# Altium PCB MainDesign_Small.PcbDoc
Units mm, origin at the board's own origin, x right, y up, seen from the top; angles counter-clockwise.
Board outline 20.1 x 20.19 mm, 2 copper layers (Top Layer, Bottom Layer); 43 components, 30 nets, 181 pads, 36 vias.
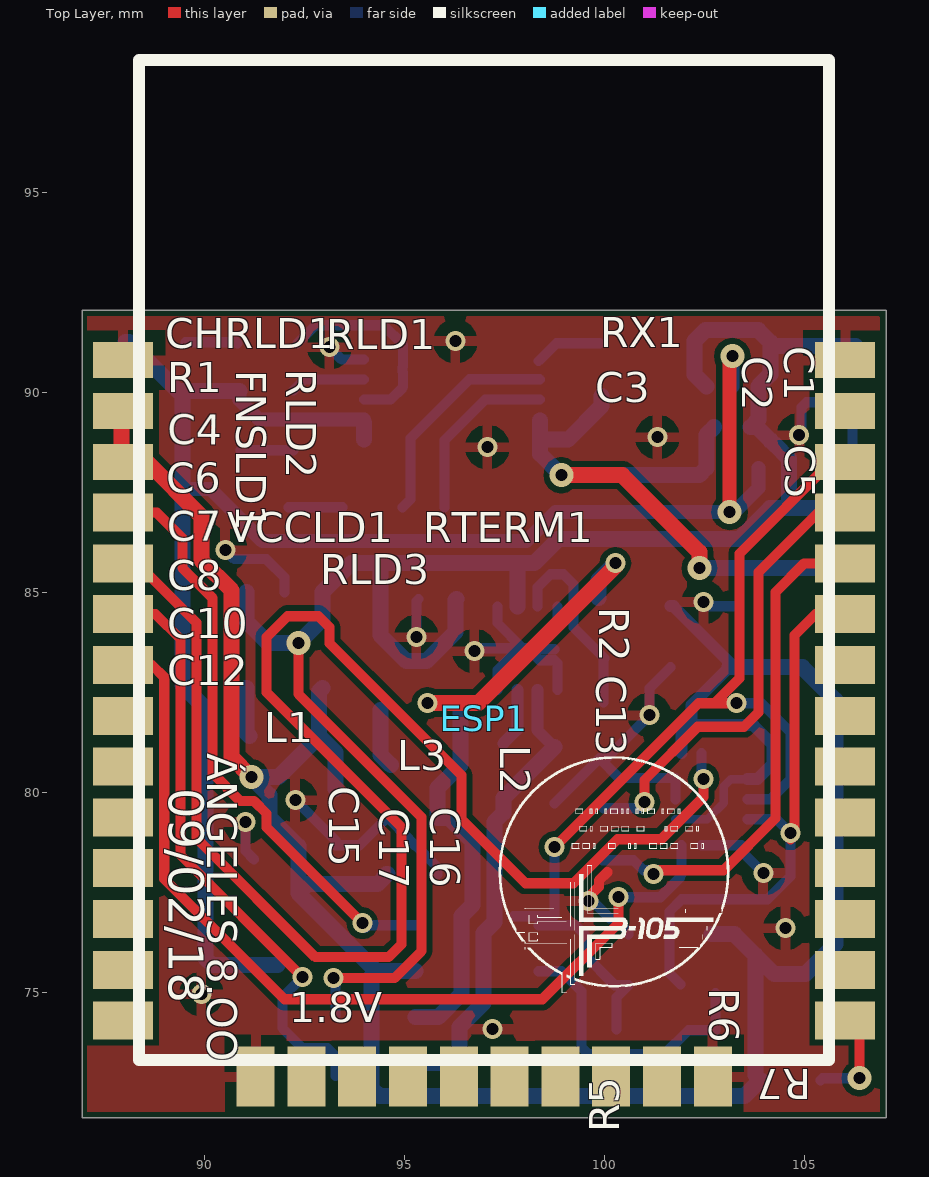
[diagram p0: Top Layer view]
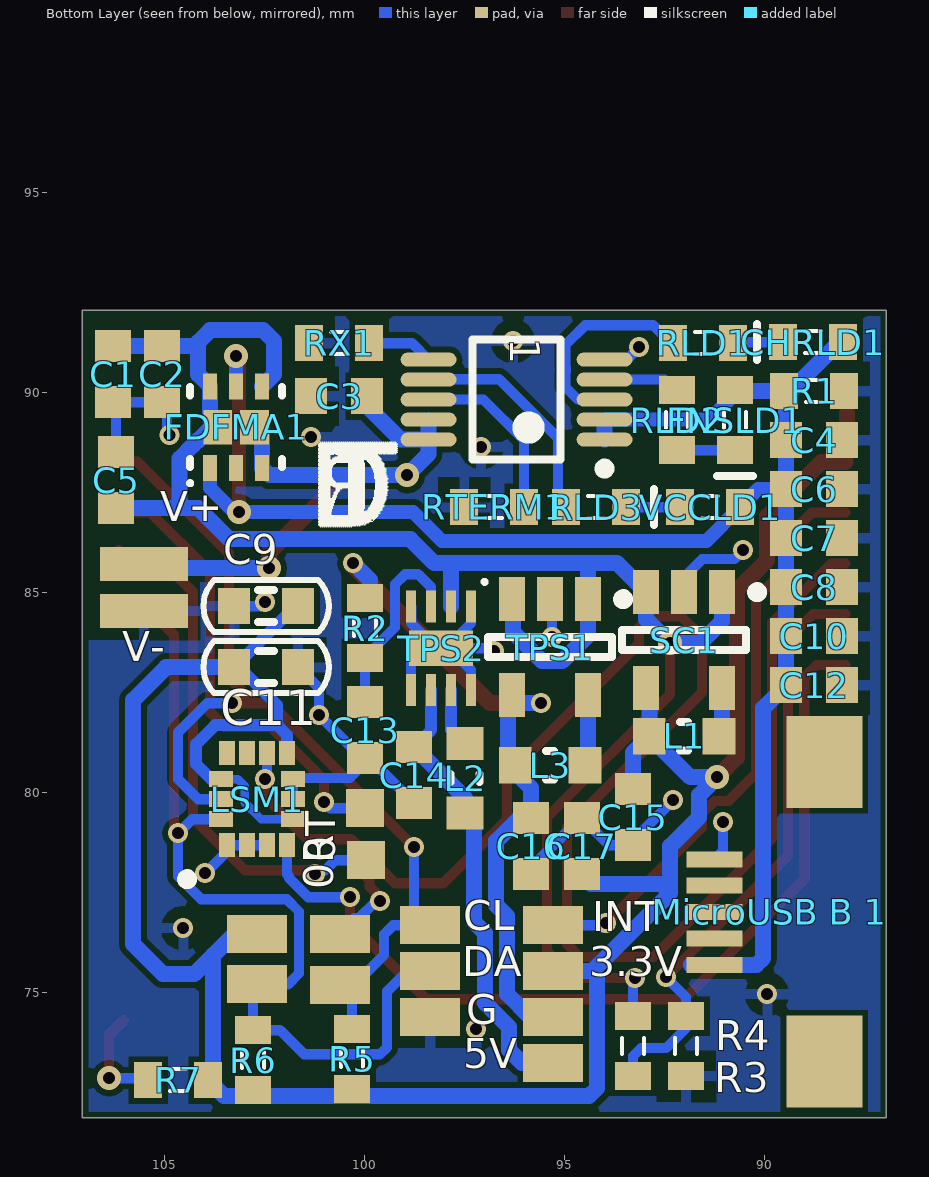
[diagram p1: Bottom Layer view, seen from below]
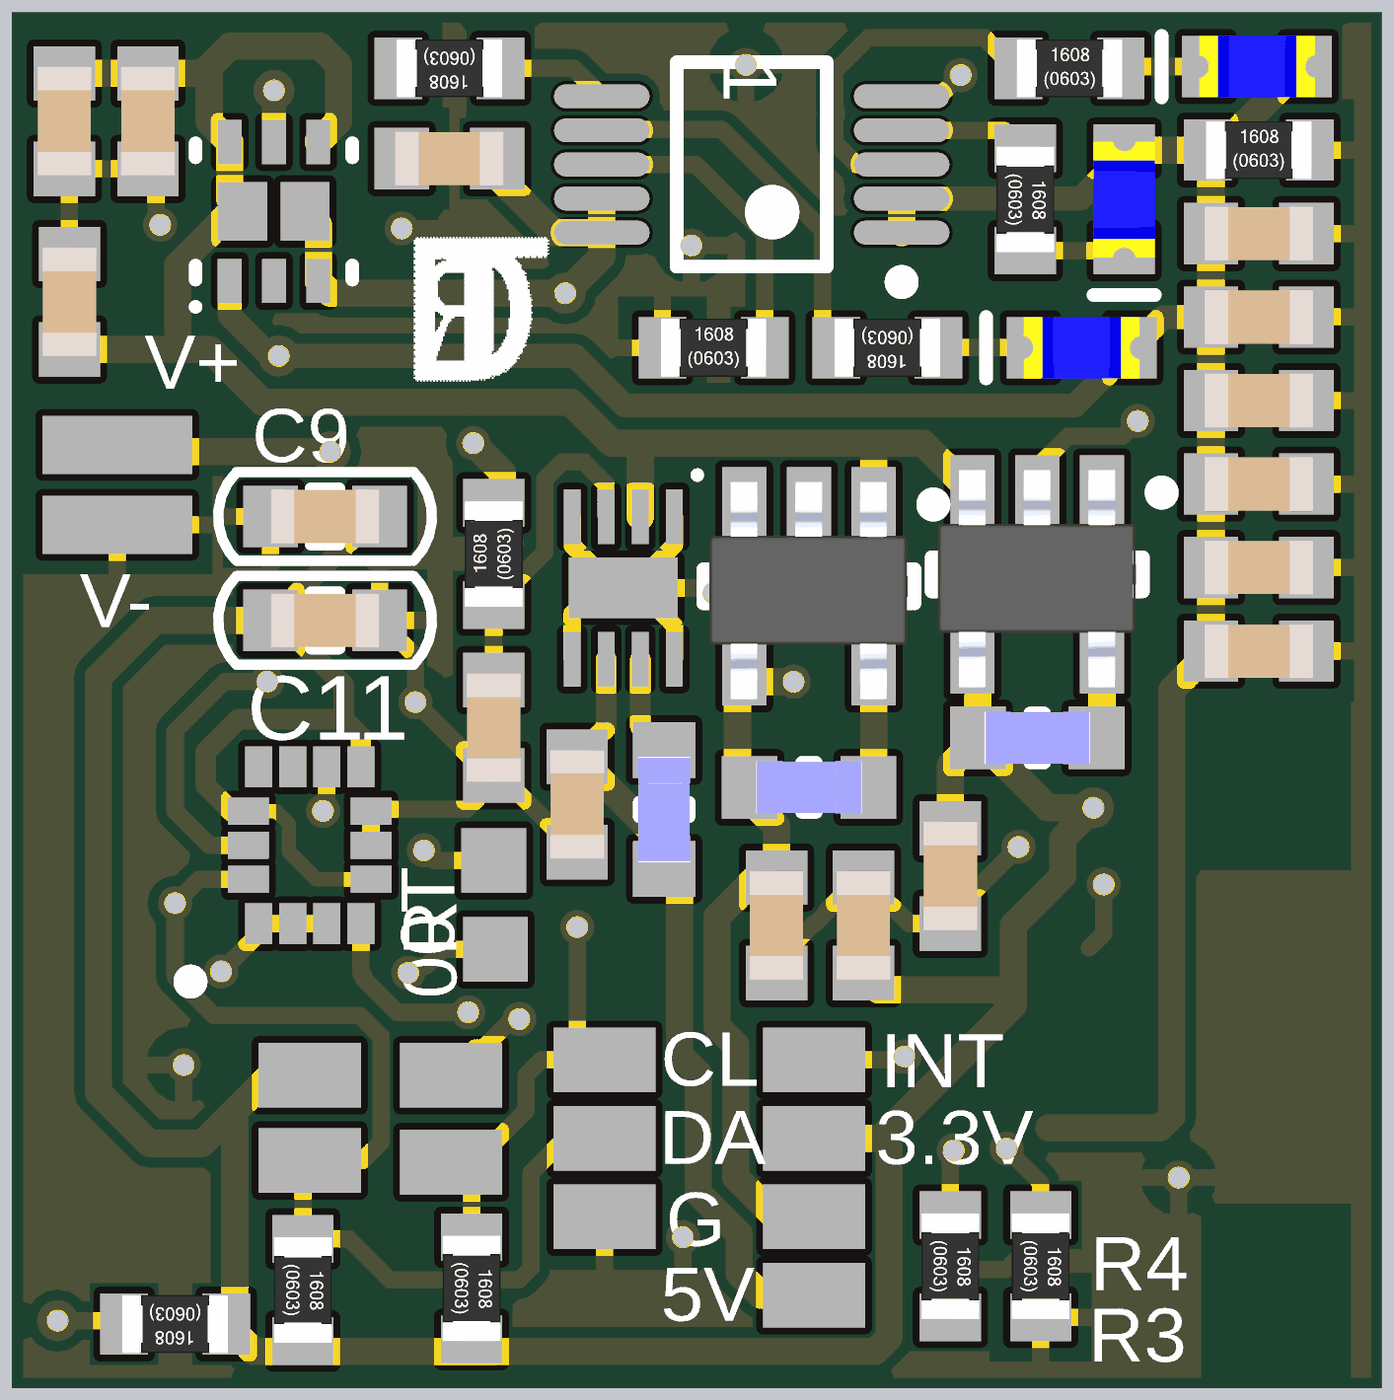
[diagram p2: 3D render of the assembled board from below, using the file's embedded part models]

## Layer stack, top to bottom
Top Solder: solder mask 0.0102, Solder Resist, Dk 3.5
Top Layer: signal copper 0.0356
Dielectric 1: dielectric 0.32, FR-4, Dk 4.8
Bottom Layer: signal copper 0.0356
Bottom Solder: solder mask 0.0102, Solder Resist, Dk 3.5

## Board outline
86.944,71.857 86.944,92.05 107.048,92.05 107.048,71.857

## Design rules (kind name [scope] priority, off if disabled: settings)
Clearance [All] p1: gap=0.15 ignorepadtopadclearanceinfootprint=FALSE except(0: Arc-Hole Track-Hole SMDPad-Hole THPad-Hole Via-Hole Fill-Hole Poly-Hole Region-Hole Text-Hole; 0.09: SMDPad-SMDPad)
ComponentClearance VbatClearance [InComponent('10114830')] p1: gap=0.01 collisioncheckmode=3 verticalgap=0.01 showdistances=FALSE
ComponentClearance ComponentClearance_1 [All] p2: gap=0.254 collisioncheckmode=3 verticalgap=0.254 showdistances=FALSE
HoleSize [All] p1: absolutevalues=TRUE maxlimit=6.3 minlimit=0.3 maxpercent=80.000 minpercent=20.000
PolygonConnect [All] p1: connectstyle=Relief reliefconductorwidth=0.25 reliefentries=4 polygonreliefangle="90 Angle" airgapwidth=0.3
RoutingVias [All] p1: holewidth=0.3 width=0.6 viastyle="Through Hole" minholewidth=0.3 minwidth=0.6 maxholewidth=6.3 maxwidth=10.6
SilkToSilkClearance [All] p1: silktosilkclearance=0
SilkToSolderMaskClearance [IsPad] p1: minsilkscreentomaskgap=0 clearancetoexposedcopper=TRUE
SolderMaskExpansion [All] p1: expansion=0.102
Width [All] p1: maxlimit=10 minlimit=0.15 preferedwidth=0.25
26 further rules are at their usual default settings.

## Components (designator, comment, footprint, x,y, rotation, side; value= is the part's Value field where it differs from the comment)
1 "MCP73833" MCP73833/4 96.19,89.814 r0 bottom (schematic designator 73833)
C1 "Cap" "0603 Cap"#1 106.275,90.45 r90 bottom value=4.7u (schematic designator C10)
C2 "Cap" "0603 Cap"#1 105.05,90.45 r90 bottom value=10u (schematic designator C9)
C3 "Cap" "0603 Cap"#1 100.625,89.9 r0 bottom value=4.7u (schematic designator C8)
C4 "Cap" "0603 Cap"#1 88.75,88.8 r180 bottom value=1n (schematic designator C5)
C5 "Cap" "0603 Cap"#1 106.2,87.8 r90 bottom value=10u (schematic designator C11)
C6 "Cap" "0603 Cap"#1 88.75,87.575 r180 bottom value=4.7u
C7 "Cap" "0603 Cap"#1 88.75,86.35 r180 bottom value=100n (schematic designator C4)
C8 "Cap" "0603 Cap"#1 88.75,85.125 r0 bottom value=100n (schematic designator C3)
C9 "Cap" "0603 Cap"#2 102.45,84.65 r0 bottom value=100n (schematic designator C16)
C10 "Cap" "0603 Cap"#1 88.75,83.9 r180 bottom value=100n (schematic designator C2)
C11 "Cap" "0603 Cap"#2 102.45,83.125 r0 bottom value=100n (schematic designator C17)
C12 "Cap" "0603 Cap"#1 88.75,82.675 r180 bottom value=10u (schematic designator C1)
C13 "Cap" "0603 Cap"#1 99.975,81.55 r90 bottom value=10n (schematic designator C14)
C14 "Cap" "0603 Cap"#1 98.75,80.425 r90 bottom value=22u (schematic designator C15)
C15 "Cap" "0603 Cap"#1 93.275,79.375 r90 bottom value=100u (schematic designator C7)
C16 "Cap" "0603 Cap"#1 95.825,78.65 r90 bottom value=10u (schematic designator C13)
C17 "Cap" "0603 Cap"#1 94.55,78.65 r270 bottom value=22u (schematic designator C12)
CHRLD1 "LED" "0603 LED-BLUE" 88.775,91.25 r0 bottom (schematic designator CHRLD)
ESP1 "ESP32" ESP32 94.97,85.8 r0 top locked (schematic designator ESP32)
FDFMA1 "FDFMA2P857" FDFMA2P857 103.2,89.125 r90 bottom (schematic designator FDFMA2P857)
FNSLD1 "LED" "0603 LED-BLUE" 90.725,89.3 r270 bottom (schematic designator FNSLD)
L1 "L1" "0603 IND" 92,81.4 r0 bottom value=1u
L2 "L3" "0603 IND" 97.475,80.35 r270 bottom value=2.2u (schematic designator L3)
L3 "L2" "0603 IND" 95.35,80.675 r0 bottom value=10u (schematic designator L2)
LSM1 "LSM6DS3" LSM6DS3 102.675,79.825 r90 bottom (schematic designator LSM6DS3)
"MicroUSB B 1" "MicroUSB B 2.0" "MicroUSB B 2.0" 187.63,172.2 r90 bottom locked (schematic designator "MicroUSB B 2.0")
R1 "Res" "0603 Res" 88.75,90.025 r180 bottom value=10K (schematic designator R4)
R2 "Res" "0603 Res" 99.975,84.1 r90 bottom value=100k (schematic designator R9)
R3 "Res" "0603 Res" 91.95,73.65 r270 bottom value=4K3 (schematic designator R8)
R4 "Res" "0603 Res" 93.275,73.65 r270 bottom value=10K (schematic designator R7)
R5 "Res" "0603 Res" 100.3,73.325 r270 bottom value=1K (schematic designator R2)
R6 "Res" "0603 Res" 102.775,73.3 r270 bottom value=1K (schematic designator R3)
R7 "Res" "0603 Res" 104.65,72.8 r0 bottom value=0 (schematic designator R5)
RLD1 "Res" "0603 Res" 91.525,91.225 r180 bottom value=1K
RLD2 "Res" "0603 Res" 92.175,89.3 r270 bottom value=1K
RLD3 "Res" "0603 Res" 94.2,87.125 r0 bottom value=1K
RTERM1 "Res" "0603 Res" 96.75,87.125 r180 bottom value=10K (schematic designator RTERM)
RX1 "Res" "0603 Res" 100.625,91.225 r0 bottom value=2K (schematic designator RX)
SC1 "SC189ZSKCT" SOT23-5 92,83.8 r270 bottom (schematic designator SC189ZSKCT)
TPS1 "TPS6220" SOT23-5 95.35,83.625 r270 bottom (schematic designator TPS6220)
TPS2 "TPS62173DSGT" TPS62173DSGT 98.075,83.6 r270 bottom (schematic designator TPS62173DSGT)
VCCLD1 "LED" "0603 LED-BLUE" 91.35,87.125 r0 bottom (schematic designator VCCLD)

## Footprints (in the part's own frame and the unit in brackets; to place one, negate y for a bottom-side part, rotate by r counter-clockwise, add the part's x,y. Pads: shape width x height; smd on the part's side, far side on the other; paste and mask are expansions set on the pad)
"0603 Cap"#1 [mm] "Chip Capacitor, Body 1.6x0.8mm, IPC High Density"
  rect 0.8x0.9 smd: 1(-0.7,0) 2(0.7,0)
  body extent -0.8,-0.4 0.8,0.4, height 0.78
"0603 Cap"#2 [mm] "Chip Capacitor, Body 1.6x0.8mm, IPC High Density"
  rect 0.8x0.9 smd: 1(-0.8,0) 2(0.8,0)
  silkscreen extent -1.57,-0.65 1.57,0.65, body extent -0.8,-0.4 0.8,0.4, height 0.78
"0603 IND" [mm] "Chip Inductor, 2-Leads, Body 1,60x0,80mm, IPC Medium Density"
  rect 0.82x0.92 smd: 1(-0.87,0) 2(0.87,0)
  silkscreen extent -0.1,-0.36 0.1,0.36, body extent -0.77,-0.38 0.77,0.38, height 0.52
"0603 LED-BLUE" [mm] "LED, Body 1.6x0.8mm, IPC High Density"
  rect 0.7x0.9 smd: 1(-0.75,0) 2(0.75,0)
  silkscreen extent -0.2,-0.45 1.4,0.45, body extent -0.85,-0.45 0.85,0.45, height 0.9
"0603 Res" [mm] "Chip Resistor, Body 1.6x0.8mm, IPC High Density"
  rect 0.7x0.9 smd: 1(-0.75,0) 2(0.75,0)
  silkscreen extent -0.2,-0.28 0.2,0.28, body extent -0.78,-0.43 0.77,0.42, height 0.44
ESP32 [mm]
  rect 1.5x0.9 smd: 1(-7,5) 2(-7,3.73) 3(-7,2.46) 36(11.05,2.46) 37(11.05,3.73) 38(11.05,5)
  rect 1.5x0.95 smd: 4(-7,1.19) 5(-7,-0.08) 6(-7,-1.35) 7(-7,-2.62) 8(-7,-3.89) 9(-7,-5.16) 10(-7,-6.43) 11(-7,-7.7) 12(-7,-8.97) 13(-7,-10.24) 14(-7,-11.51) 25(11.05,-11.51) 26(11.05,-10.24) 27(11.05,-8.97) 28(11.05,-7.7) 29(11.05,-6.43) 30(11.05,-5.16) 31(11.05,-3.89) 32(11.05,-2.62) 33(11.05,-1.35) 34(11.05,-0.08) 35(11.05,1.19)
  rect 0.95x1.5 smd: 15(-3.69,-12.91) 16(-2.42,-12.91) 17(-1.15,-12.91) 18(0.12,-12.91) 19(1.39,-12.91) 20(2.66,-12.91) 21(3.93,-12.91) 22(5.2,-12.91) 23(6.47,-12.91) 24(7.74,-12.91)
  silkscreen extent -6.6,-12.5 10.65,12.5, body extent -6.63,-12.5 10.68,12.55, height 2
FDFMA2P857 [mm] "SON, 6-Leads, Body 2,00x2,00mm, Pitch 0,65mm, Thermal Pad 1,64x0,86mm, IPC Medium Density"
  rect 0.65x0.35 smd: 1(-1.02,0.65) 2(-1.02,0) 3(-1.02,-0.65) 4(1.02,-0.65) 5(1.02,0) 6(1.02,0.65)
  rect 0.86x0.72 smd: 7(0,0.457) 8(0,-0.457)
  silkscreen extent -1.45,-1.15 1,1.2, body extent -1,-1 1,1, height 0.8
LSM6DS3 [mm]
  rect 0.6x0.4 smd: 1(-1.15,0.75) 2(-1.15,0.25) 3(-1.15,-0.25) 4(-1.15,-0.75) 8(1.15,-0.75) 9(1.15,-0.25) 10(1.15,0.25) 11(1.15,0.75)
  rect 0.4x0.6 smd: 5(-0.5,-0.9) 6(0,-0.9) 7(0.5,-0.9) 12(0.5,0.9) 13(0,0.9) 14(-0.5,0.9)
  silkscreen extent -2.12,1.63 -1.88,1.88, body extent -1.55,-1.3 1.55,1.3, height 0.86
MCP73833/4 [mm] "Stand-Alone Linear Li-Ion / Li-Polymer Charge  Management Controller"
  oval 1.4x0.35 smd mask+0.05: 1(-2.2,1) 2(-2.2,0.5) 3(-2.2,0) 4(-2.2,-0.5) 5(-2.2,-1) 6(2.2,-1) 7(2.2,-0.5) 8(2.2,0) 9(2.2,0.5) 10(2.2,1)
  silkscreen extent -2.32,-1.5 1.1,1.85, body extent -1.5,-1.5 1.5,1.5, height 1.1
"MicroUSB B 2.0" [mm]
  rect 2.3x1.9 smd: 0(-98.933,-99.136) 0(-91.44,-99.136)
  rect 0.4x1.4 smd: 1(-96.52,-96.393) 2(-95.86,-96.393) 3(-95.199,-96.393) 4(-94.539,-96.393) 5(-93.878,-96.393)
  body extent -99.6,-101.99 -90.8,-96.39, height 2.89
SOT23-5 [mm] "SOT23, 5-Leads, Body 2.9x1.6mm, Pitch 0.95mm, Lead Span 2.8mm, IPC Medium Density"
  rect 1.1x0.65 smd: 1(-1.2,0.95) 2(-1.2,0) 3(-1.2,-0.95) 4(1.2,-0.95) 5(1.2,0.95)
  silkscreen extent -1.32,-1.55 0.25,1.95, body extent -1.54,-1.46 1.66,1.44, height 0.94
TPS62173DSGT [mm]
  rect 0.8x0.25 smd: 1(-1.045,0.75) 2(-1.045,0.25) 3(-1.045,-0.25) 4(-1.045,-0.75) 5(1.045,-0.75) 6(1.045,-0.25) 7(1.045,0.25) 8(1.045,0.75)
  rect 0.89x1.6 smd: 9(0,0)
  silkscreen extent -1.71,1.04 -1.61,1.14, body extent -0.95,-0.95 0.95,0.95, height 0.8

## Part data
1: Supplier Part Number 1=MCP73833T-AMI/UNCT-ND, Supplier 1=Digi-Key
FDFMA1: Supplier Part Number 1=FDFMA2P857CT-ND, Supplier 1=Digi-Key
L1 L2 L3: library part Ind
LSM1: Supplier Part Number 1=497-15383-1-ND, Supplier 1=Digi-Key
SC1: library part MCP1603T-330I/OS, "500mA Synchronous Buck Regulator, 3.3V, 2.0 MHz, 5-Pin TSOT, Industrial Temperature, Tape and Reel", ComponentLink1Description="Manufacturer Link", ComponentLink1URL=http://www.microchip.com, ComponentLink2Description=Datasheet, ComponentLink2URL=http://ww1.microchip.com/downloads/en/DeviceDoc/22042a.pdf, ComponentLink3Description="Packaging Specification", ComponentLink3URL=http://ww1.microchip.com/downloads/en/PackagingSpec/00049AW.pdf, DatasheetVersion="revA, May-2007", PackageDescription="5-Lead Plastic Small Outline Transistor (OS) [TSOT]", PackageReference=TSOT-OS5, PackageVersion="revAW, Oct-2008", Published=29-Jan-2009, Publisher="Altium Limited"
TPS1 TPS2: ComponentLink1Description="Manufacturer Link", ComponentLink1URL=http://www.microchip.com, ComponentLink2Description=Datasheet, ComponentLink2URL=http://ww1.microchip.com/downloads/en/DeviceDoc/22042a.pdf, ComponentLink3Description="Packaging Specification", ComponentLink3URL=http://ww1.microchip.com/downloads/en/PackagingSpec/00049AW.pdf, DatasheetVersion="revA, May-2007", PackageDescription="5-Lead Plastic Small Outline Transistor (OS) [TSOT]", PackageReference=TSOT-OS5, PackageVersion="revAW, Oct-2008", Published=29-Jan-2009, Publisher="Altium Limited"

## Free pads (board coordinates)
  rect 1.5x0.95 smd far side: 5(95.275,73.225) 5(95.275,74.375) 5(95.275,75.525) 5(95.275,76.675) 5(98.35,74.375) 5(98.35,75.525) 5(98.35,76.675) 5(100.6,75.175) 5(100.6,76.45) 5(102.675,75.2) 5(102.675,76.45)
  rect 0.95x0.95 smd far side: 5(99.95,78.3) 5(99.975,79.6)
  rect 2.2x0.85 smd far side: 7(105.5,84.525) 7(105.5,85.7)

## Via types
v1: diameter 0.5, hole 0.3, Top Layer to Bottom Layer, tented both sides, 28 vias
v2: diameter 0.6, hole 0.3, Top Layer to Bottom Layer, tented both sides, 7 vias
v3: diameter 0.5, hole 0.3, Top Layer to Bottom Layer, 1 vias

## Nets (pads, with @x,y where several pads share a name; then routed paths per layer and width w, separated by ;. In a path a pad name is that pad's centre, name@x,y a point inside that pad or via, vN(x,y) a via of type N, cw(c..) or ccw(c..) an arc to the next point about the centre after c; other vN are vias at no path point)
1.8V: C16.2 L3.2 pad.5@95.275,74.375 R2.2 TPS1.4 | length 17.6
  Top Layer w0.4: v1(95.575,82.225) 96.85,82.225 100.275,85.65 v1(100.275,85.725)
  Bottom Layer w0.4: pad.5@95.275,74.375 95.845,74.375 96.425,74.955 96.425,76.9 96.7,77.175 96.7,78.775 96.125,79.35 C16.2 95.825,80.1 96.4,80.675 96.4,82.225 v1(95.575,82.225) ; R2.2@99.85,84.85 99.85,85.3 v1(100.275,85.725)
3.3V: C9.1 C11.2 C15.2 C17.2 ESP1.2 ESP1.3 L1.2 LSM1.5 LSM1.8 LSM1.12 pad.5@95.275,75.525 pad.5@102.675,76.45 R5.2 R6.2 R7.1 SC1.4 | length 64.6
  Top Layer w0.4: 87.927,88.751 ESP1.2@87.927,89.475 ; ESP1.3 88.565,88.26 89.925,86.9 89.925,85.801 90.682,85.045 90.682,80.868 v2(91.175,80.375)
  Bottom Layer w0.21: LSM1.5 102.575,79.325 102.985,79.735 102.985,80.15 103.16,80.325 LSM1.12
  Bottom Layer w0.3: C9.1 101.725,84.65 C11.2 ; LSM1.8 101.925,81.425 102.175,81.675 ; C11.2@103.125,83.125 102.175,82.175 102.175,81.675 ; LSM1.12 103.825,80.325 104.2,80.7 104.2,81.2 103.725,81.675 102.175,81.675
  Bottom Layer w0.4: SC1.4 92.87,82.52 L1.2 ; C15.2 93.275,80.995 L1.2 ; C17.2 94.55,77.925 94.328,77.703 92.576,77.703 92.35,77.476 ; C17.2@94.562,77.937 C17.2@94.575,77.95 ; pad.5@95.275,75.525 94.301,75.525 ; pad.5@102.675,76.45 103.25,76.45 103.775,75.925 ; C11.2@103.125,83.125 C11.2 104.95,83.125 105.775,82.3 105.775,76.2 105.025,75.45 104.25,75.45 103.775,75.925 ; 92.35,77.476 92.35,78.65 91.625,79.375 91.625,79.925 v2(91.175,80.375) 91.845,80.375 L1.2 ; 92.35,77.476 94.301,75.525 ; 94.301,75.525 94.175,75.399 94.175,72.605 94.38,72.4 103.5,72.4 R7.1 103.775,72.925 103.775,75.925
5V: C14.2 L2.2 pad.5@95.275,73.225 TPS2.6 | length 11.4
  Bottom Layer w0.3: TPS2.6 98.325,81.55 C14.2
  Bottom Layer w0.4: pad.5@95.275,73.225 96.05,73.225 96.375,73.55 96.375,74.127 96.975,74.727 96.975,76.475 97.25,76.75 97.25,76.9 97.25,79.255 L2.2 97.475,79.85 C14.2
GND: 1.5 "MicroUSB B 1.5" C1.1 C2.1 C3.2 C4.2 C5.2 C6.2 C7.2 C8.1 C9.2 C10.2 C11.1 C12.2 C13.1 C14.1 C15.1 C16.1 C17.1 ESP1.1 ESP1.15 ESP1.24 ESP1.38 LSM1.1 LSM1.2 LSM1.3 LSM1.6 LSM1.7 pad.5@98.35,74.375 pad.5@100.6,76.45 pad.7@105.5,84.525 R1.2 R3.2 RTERM1.1 RX1.2 SC1.2 TPS1.2 TPS2.1 TPS2.4 TPS2.5 TPS2.8 TPS2.9 | length 33.2
  Top Layer w0.254: v1(99.6,77.275) 99.6,77.37 99.862,77.632 99.862,77.791 100.071,78
  Bottom Layer w0.25: v1(95.3,83.875) 95.3,84.775 TPS1.2
  Bottom Layer w0.254: v1(90.525,86.05) 90.748,85.827 91.548,85.827 92,85.375 SC1.2 ; v1(91.025,79.25) 91.025,78.533 91.237,78.322 ; v1(92.275,79.8) 93.275,78.8 C15.1 93.875,78.675 C17.1 94.6,79.35 95.098,78.852 95.098,78.835 95.26,78.673 95.277,78.673 95.825,78.125 C16.1 ; v1(93.125,91.125) 93.436,90.814 1.5 ; v1(96.75,83.525) 96.825,83.6 TPS2.9@97.875,83.6 ; TPS2.8 97.325,83.05 TPS2.9@97.875,83.6 ; TPS2.1 97.325,84.228 TPS2.9@97.953,83.6 ; TPS2.9@98.425,83.575 TPS2.9@98.747,83.575 ; C14.1 C13.1@99.875,80.85 ; TPS2.4 98.823,84.226 98.197,83.6 TPS2.9 ; TPS2.5 98.825,83.225 98.75,83.3 98.375,83.3 TPS2.9 ; v1(99.6,77.275) 99.705,77.275 100.132,76.848 100.252,76.848 100.6,76.5 pad.5@100.6,76.45 ; C11.1 101.125,82.6 v1(101.125,81.925) 100.05,80.85 C13.1 C13.1@99.875,80.85 ; LSM1.6 LSM1.7 101.775,80.352 100.373,80.352 C13.1@99.875,80.85 ; LSM1.3 LSM1.2 LSM1.1 103.425,78.525 v1(103.975,77.975) ; v3(102.475,84.75) 102.575,84.65 C9.2 ; v1(104.87,88.929) 104.93,88.929 104.93,89.63 C2.1 C1.1 106.2,89.675 C5.2 ; TPS2.9@97.875,83.6 TPS2.9@97.953,83.6 ; TPS2.9@97.953,83.6 TPS2.9
  other v1: 97.2,74.075 89.925,74.95 104.525,76.6 97.075,88.625 101.325,88.875 96.275,91.275
INT_MAX30102: ESP1.4 pad.5@95.275,76.675 | length 14.8
  Top Layer w0.254: ESP1.4 88.81,86.99 89.448,86.352 89.448,85.604 90.205,84.847 90.205,80.47 90.898,79.777 91.243,79.777 91.552,79.468 91.552,79.123 v1(93.95,76.725)
  Bottom Layer w0.254: v1@94,76.675 pad.5@95.275,76.675
  Bottom Layer w0.4: v1(93.95,76.725) v1@94,76.675
Net1_1: 1.1 1.2 "MicroUSB B 1.1" C4.1 C6.1 C7.1 C8.2 C10.1 C12.1 CHRLD1.1 FDFMA1.1 FDFMA1.5 FNSLD1.1 R1.1 VCCLD1.1 | length 44.3
  Top Layer w0.35: v2(103.13,87.004) 103.13,90.83 v2(103.2,90.9)
  Bottom Layer w0.35: C6.1 90.15,87.575 VCCLD1.1 91.446,86.279 98.054,86.279 98.779,87.004 v2(103.13,87.004) 103.154,87.004 103.204,86.954 103.85,87.6 FDFMA1.1 ; FNSLD1.1@90.875,90.025 90.875,89.804 91.364,89.314 1.2 ; FDFMA1.5 v2(103.2,90.9)
  Bottom Layer w0.4: CHRLD1.1 88.12,91.25 89.345,90.025 R1.1 ; FNSLD1.1@90.875,90.025 R1.1 ; 91.83,75.68 91.237,75.68 90.195,75.68 90.025,75.85 90.025,82.1 C12.1 C10.1 C8.2 C7.1 C6.1 C4.1 89.45,89.975 R1.1 ; 1.1 1.2@93.99,89.23
Net1_3: 1.3 RLD1.1 | length 5.2
  Bottom Layer w0.254: RLD1.1@92.325,91.225 92.775,91.675 94.475,91.675 94.967,91.183 94.967,90.627 94.95,90.61 94.95,90.518 94.967,90.502 94.967,90.127 94.654,89.814 1.3
Net1_4: 1.4 RLD2.1 | length 1.9
  Bottom Layer w0.254: RLD2.1@92.225,90.05 92.489,90.314 1.4
Net1_6: 1.6 RX1.1 | length 1.7
  Bottom Layer w0.254: 1.6@98.355,90.78 1.6 98.8,91.225 RX1.1
Net1_7: 1.7 RLD3.2 | length 5.7
  Bottom Layer w0.254: RLD3.2 95.15,87.325 95.15,88.85 96.625,90.325 98.379,90.325 1.7
Net1_8: 1.8 RTERM1.2 | length 4.5
  Bottom Layer w0.254: RTERM1.2 96,88.8 97.014,89.814 1.8
NetC1_2: C1.2 C2.2 C5.1 FDFMA1.4 FDFMA1.6 FDFMA1.7 R4.1 SC1.1 SC1.3 TPS1.1 TPS1.3 TPS2.2 | length 46.9
  Top Layer w0.25: v2(92.349,83.725) 92.349,82.451 95.425,79.375 95.425,76.025 94.75,75.35 v1(93.225,75.35)
  Bottom Layer w0.25: v1(93.225,75.35) 93.275,75.3 R4.1
  Bottom Layer w0.4: SC1.1 91.05,84.275 91.6,83.725 v2(92.349,83.725) 92.95,84.325 SC1.3 93.675,85.725 94.375,85.725 ; TPS1.3 96.275,84.8 96.275,84 95.55,83.275 95.05,83.275 94.4,83.925 TPS1.1 94.4,85.7 94.375,85.725 ; TPS2.2 97.825,85.7 97.85,85.725 ; FDFMA1.4 102.25,90.445 102.25,91.275 102.525,91.55 103.85,91.55 104.15,91.25 ; C5.1 104.625,87.1 ; C1.2 C2.2 104.25,91.15 104.15,91.25 ; 94.375,85.725 97.85,85.725 ; 97.85,85.725 98.242,85.725 98.842,86.325 103.37,86.325 104.145,87.1 104.625,87.1 ; 104.15,91.25 104.15,90.445 FDFMA1.6 103.85,89.318 FDFMA1.7 103.825,89.125 104.15,88.8 104.15,88.78 104.17,88.78 104.27,88.68 104.612,88.337 104.612,87.113 104.625,87.1
NetC13_2: C13.2 R2.1 TPS2.3 | length 4.9
  Bottom Layer w0.254: TPS2.3 98.325,85.125 98.65,85.45 98.975,85.45 99.227,85.198 99.227,84.123 R2.1@100,83.35 ; C13.2 R2.1
NetCHRLD1_2: CHRLD1.2 RLD1.2 | length 1.3
  Bottom Layer w0.254: CHRLD1.2 90.8,91.25 RLD1.2@90.825,91.225
NetESP1_5: ESP1.5 LSM1.9 | length 40.2
  Top Layer w0.254: ESP1.5 88.316,85.72 89.801,84.236 89.801,78.849 92.773,75.877 94.602,75.877 94.925,76.2 94.925,79.125 91.55,82.5 91.55,83.874 92.076,84.4 92.85,84.4 93.125,84.125 93.125,83.725 96.425,80.425 96.425,79.325 98.025,77.725 99.225,77.725 100.325,78.825 101.42,78.825 102.48,79.885 v1(102.48,80.329)
  Bottom Layer w0.254: LSM1.9 102.425,80.325 102.446,80.304 102.471,80.329 v1(102.48,80.329)
NetESP1_6: ESP1.6 R3.1 R4.2 | length 15
  Top Layer w0.25: ESP1.6 88.775,84.45 89.399,83.826 89.399,78.426 v1(92.45,75.375)
  Bottom Layer w0.25: v1(92.45,75.375) 91.95,74.875 R3.1 91.95,74.1 92.45,73.6 93.075,73.6 93.275,73.4 R4.2
NetESP1_7: ESP1.7 LSM1.4 | length 22.8
  Top Layer w0.254: ESP1.7 88.692,83.18 88.997,82.875 88.997,82.4 88.997,77.828 92.002,74.823 98.448,74.823 100.35,76.725 v1(100.35,77.375)
  Bottom Layer w0.254: v1(100.35,77.375) 101.396,77.375 101.882,77.861 101.882,77.907 101.925,77.95 LSM1.4
NetESP1_17: ESP1.17
NetESP1_18: ESP1.18
NetESP1_25: ESP1.25 R7.2 | length 2.6
  Top Layer w0.254: ESP1.25 106.375,73.935 v2(106.375,72.85)
  Bottom Layer w0.254: R7.2 105.45,72.85 v2(106.375,72.85)
NetESP1_34: ESP1.34 pad.5@99.95,78.3 | length 13.1
  Top Layer w0.254: v1(101.23,77.954) 101.326,78.05 102.98,78.05 104.275,79.345 104.275,85 104.995,85.72 ESP1.34 ; ESP1.34@105.977,85.9 ESP1.34@106.132,86.055
  Bottom Layer w0.254: pad.5@99.95,78.3 100.725,78.3 100.975,78.05 101.301,78.05 101.23,77.979 v1(101.23,77.954)
NetESP1_35: ESP1.35 pad.5@99.975,79.6 | length 11.5
  Top Layer w0.254: v1(101,79.75) 101,80.304 102.334,81.637 103.488,81.637 103.85,82 103.85,85.5 105.34,86.99 ESP1.35
  Bottom Layer w0.254: pad.5@99.975,79.6 100.85,79.6 v1(101,79.75)
NetFNSLD1_2: FNSLD1.2 RLD2.2 | length 1.3
  Bottom Layer w0.254: FNSLD1.2@90.9,88.55 RLD2.2@92.225,88.55
NetL1_1: L1.1 SC1.5 | length 1.2
  Bottom Layer w0.4: SC1.5 91.05,81.48 L1.1
NetL2_1: L2.1 TPS2.7 | length 1.5
  Bottom Layer w0.3: L2.1 97.825,81.57 TPS2.7
NetL3_1: L3.1 TPS1.5 | length 1.5
  Bottom Layer w0.4: TPS1.5@94.4,82.05 94.4,80.935 L3.1@94.66,80.675
NetRLD3_1: RLD3.1 VCCLD1.2 | length 1.3
  Bottom Layer w0.254: VCCLD1.2 RLD3.1
SCL_I2C: ESP1.36 LSM1.13 pad.5@98.35,76.675 pad.5@100.6,75.175 R5.1 | length 24.8
  Top Layer w0.254: v1(98.75,78.625) 102.35,82.225 v1(103.3,82.225) ; 102.825,82.3 103.375,82.85 103.375,85.962 105.673,88.26 ESP1.36
  Bottom Layer w0.254: pad.5@97.727,76.9 98.725,76.9 98.75,76.925 v1(98.75,78.625) ; pad.5@98.35,76.675 99.275,76.675 99.5,76.45 99.5,75.933 100.258,75.175 100.6,75.175 100.3,74.875 R5.1 ; v1(103.3,82.225) 103.925,82.225 104.65,81.5 104.65,80.325 104.15,79.825 LSM1.13
SDA_I2C: ESP1.33 LSM1.14 pad.5@98.35,75.525 pad.5@102.675,75.2 R6.1 | length 21.8
  Top Layer w0.254: v1(104.65,78.975) 104.65,78.825 104.75,78.925 104.75,83.925 105.275,84.45 ESP1.33 ESP1.33@105.92,84.35
  Bottom Layer w0.254: pad.5@98.35,75.525 98.925,75.525 99.425,75.025 99.425,73.625 99.602,73.448 101.498,73.448 102.1,74.05 R6.1 pad.5@102.775,74.975 ; 101.9,75.2 101.627,75.473 101.627,75.765 101.625,75.767 101.625,75.858 101.627,75.86 101.627,77.019 101.933,77.325 104.075,77.325 104.65,77.9 v1(104.65,78.975) 104.3,79.325 LSM1.14
VBAT: 1.9 1.10 C3.1 FDFMA1.3 FDFMA1.8 pad.7@105.5,85.7 | length 16.4
  Top Layer w0.4: v2(98.925,87.925) 100.45,87.925 102.375,86 v2(102.375,85.6)
  Bottom Layer w0.254: 1.9@98.39,89.289 1.9
  Bottom Layer w0.4: 1.9@98.39,89.289 1.10 ; C3.1 99.925,89.65 99.089,88.814 1.10 ; v2(102.375,85.6) 105.4,85.6 pad.7@105.5,85.7 ; FDFMA1.8 102.55,88.932 FDFMA1.3 102.37,87.925 v2(98.925,87.925) 98.39,88.46 1.10
pads on no net: "MicroUSB B 1.0" "MicroUSB B 1.2" "MicroUSB B 1.3" "MicroUSB B 1.4" ESP1.8 ESP1.9 ESP1.10 ESP1.11 ESP1.12 ESP1.13 ESP1.14 ESP1.16 ESP1.19 ESP1.20 ESP1.21 ESP1.22 ESP1.23 ESP1.26 ESP1.27 ESP1.28 ESP1.29 ESP1.30 ESP1.31 ESP1.32 ESP1.37 FDFMA1.2 LSM1.10 LSM1.11

## Polygon pours and split planes (outlines as drawn)
GND on Top Layer "GND_UP" (solid, remove dead copper, pour order 6): 106.883,91.872 106.883,81.153 106.883,72.009 87.071,72.009 87.071,91.897 106.858,91.897
GND on Bottom Layer "GND_DOWN" (solid, remove dead copper, pour order 8): 106.883,91.897 106.883,81.153 106.883,72.009 87.097,72.009 87.097,91.897

## Silkscreen, mask and mechanical layers (free items; w line width, h text height)
Top Overlay:
  drawing of 65 lines, arcs and shapes, not listed
  text "ÁNGELES 8.OO" at 89.825,80.975 h1.28 r270
  text "09/02/18" at 88.825,80.1 h1.5 r270
  text "1.8V" at 92.125,74 h1.28
Bottom Overlay:
  region: 550 vertices and 6 holes, not listed, extent 99.161,86.622 101.15,88.755
  text "V+" at 105.1,86.525 h1.28
  text "V-" at 106.05,83.025 h1.28
  text "0T" at 100.475,78.25 h1.28 r270
  text "0R" at 100.525,77.575 h1.28 r270
  text "CL" at 97.525,76.3 h1.28
  text "INT" at 94.3,76.275 h1.28
  text "3.3V" at 94.375,75.15 h1.28
  text "DA" at 97.55,75.15 h1.28
  text "G" at 97.45,73.95 h1.28
  text "5V" at 97.525,72.85 h1.28
Mechanical 1:
  the board outline again, w0.3